# Altium PCB Board.PcbDoc
Units mil, origin at the board's own origin, x right, y up, seen from the top; angles counter-clockwise.
Board outline 3936.5 x 1968.5 mil, 2 copper layers (Top Layer, Bottom Layer); 68 components, 51 nets, 203 pads, 235 vias.
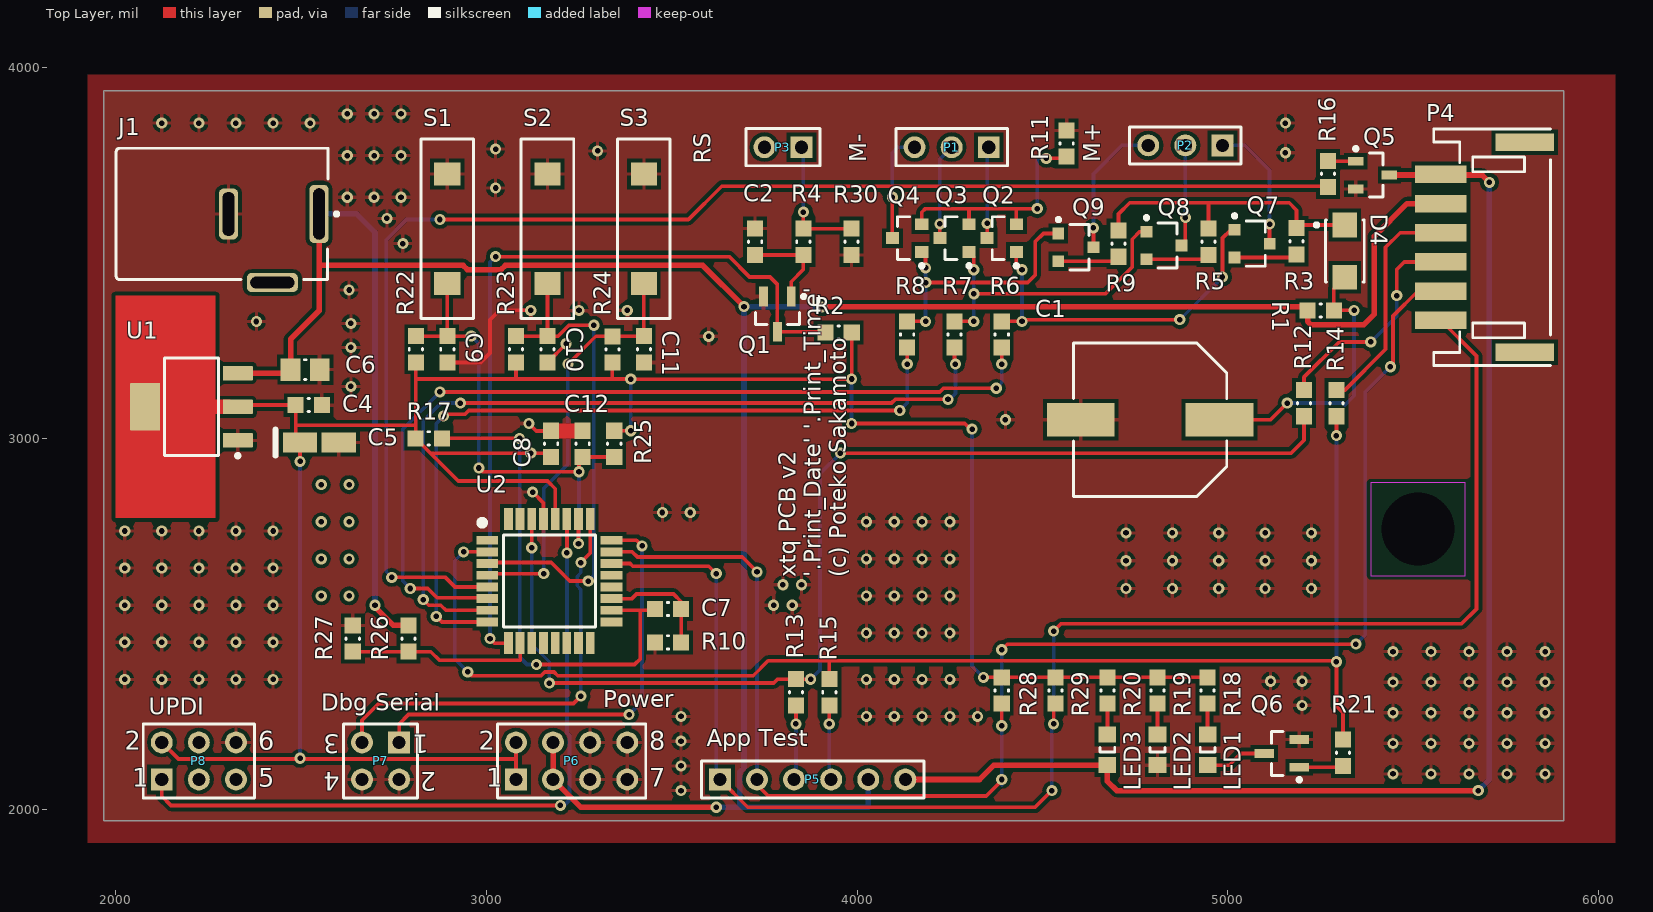
[diagram p0: Top Layer view]
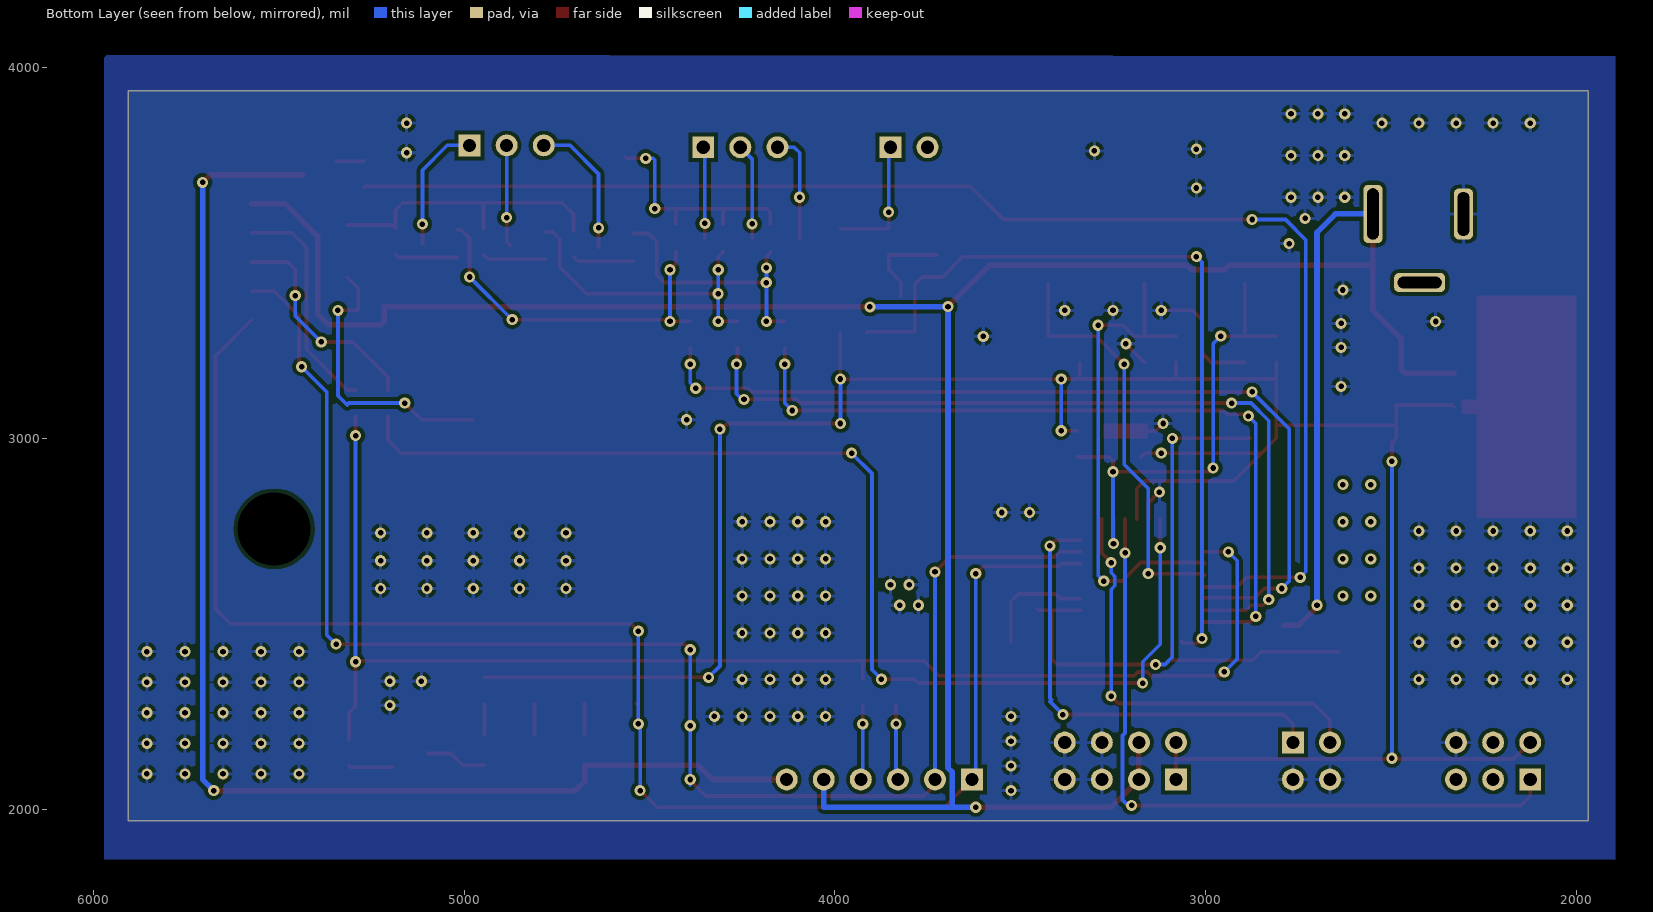
[diagram p1: Bottom Layer view, seen from below]

## Layer stack, top to bottom
Top Solder: solder mask 0.4, Solder Resist, Dk 3.5
Top Layer: signal copper 1.4
Dielectric 1: dielectric 12.6, FR-4, Dk 4.8
Bottom Layer: signal copper 1.4
Bottom Solder: solder mask 0.4, Solder Resist, Dk 3.5

## Board outline
1968.5,1968.5 5905,1968.5 5905,3937.01 1968.5,3937.01

## Design rules (kind name [scope] priority, off if disabled: settings)
Clearance [All] p1: gap=10 ignorepadtopadclearanceinfootprint=TRUE except(0: Arc-Hole Track-Hole SMDPad-Hole THPad-Hole Via-Hole Fill-Hole Poly-Hole Region-Hole Text-Hole)
PolygonConnect [All] p1: connectstyle=Relief reliefconductorwidth=10 reliefentries=4 polygonreliefangle="90 Angle" airgapwidth=10
RoutingVias [All] p1: holewidth=15 width=30 viastyle="Through Hole" minholewidth=12 minwidth=24 maxholewidth=25 maxwidth=100
SolderMaskExpansion [All] p1: expansion=4
Width [All] p1: maxlimit=50 minlimit=8 preferedwidth=10
30 further rules are at their usual default settings.

## Classes and differential pairs
component class Peripherals: C1 C2 C4 C5 C6 D4 J1 LED1 LED2 LED3 P1 P2 P3 P4 P5 P6 P7 P8 Q1 Q2 Q3 Q4 Q5 Q6 Q7 Q8 Q9 R1 R2 R3 R4 R5 R6 R7 R8 R9 R10 R11 R12 R13 R14 R15 R16 R17 R18 R19 R20 R21 R28 R29 R30 U1
component class Controller: C7 C8 C9 C10 C11 C12 R22 R23 R24 R25 R26 R27 S1 S2 S3 U2

## Components (designator, comment, footprint, x,y, rotation, side; value= is the part's Value field where it differs from the comment)
C1 "220uF" PNSC-ZA-G_M 4790,3050 r180 top
C2 "10nF 50V" CAPC0603(1608)100_M 3725,3530 r270 top value=10nF
C4 "100nF" CAPC0603(1608)100_M 2521.46,3090 r180 top
C5 "22uF" KEMT-A-3216-18-2_M 2550,2988.54 r0 top
C6 "22uF" CAPC0805(2012)145_M 2511.61,3185.39 r180 top
C7 "100nF" CAPC0603(1608)100_M 3490,2540 r180 top
C8 "100nF" CAPC0603(1608)100_M 3175,2985 r270 top
C9 "100nF" CAPC0603(1608)100_M 2895,3240 r90 top
C10 "100nF" CAPC0603(1608)100_M 3165,3240 r90 top
C11 "100nF" CAPC0603(1608)100_M 3425,3240 r90 top
C12 "100nF" CAPC0603(1608)100_M 3260,2985 r270 top
D4 "SS14-E3/5AT" VISH-DO-214AC-2_V 5315,3505 r90 top
J1 "PWR" KYCN-KLDX-0202-A_V 2305,3605 r180 top
LED1 "Controller Status" 0805_A 4945,2160 r90 top
LED2 "Power 3V3" 0805_A 4810,2160 r90 top
LED3 "App Status" 0805_A 4675,2160 r90 top
P1 "M-" HDR1X3 4355,3785 r180 top
P2 "M+" HDR1X3 4985,3790 r180 top
P3 "RS" HDR1X2 3850,3785 r180 top
P4 "App" PH2.0-WS-6P 5800,3515 r90 top
P5 "App Test" HDR1X6 3630,2080 r0 top
P6 "Power" HDR2X4 3080,2080 r0 top
P7 "Dbg Serial" HDR2X2 2765,2180 r180 top
P8 "UPDI" HDR2X3 2125,2080 r0 top
Q1 "2N7002" INF-PG-SOT23_M 3785,3335 r270 top
Q2 "NTR4003NT1G" ONSC-SOT-23-3-318-08_V 4390,3540 r180 top
Q3 "NTR4003NT1G" ONSC-SOT-23-3-318-08_V 4262.5,3540 r180 top
Q4 "NTR4003NT1G" ONSC-SOT-23-3-318-08_V 4135,3540 r180 top
Q5 "BSS806NE" INF-PG-SOT23-3_N 5390,3710 r0 top
Q6 "2N7002" INF-PG-SOT23_M 5145,2150.16 r180 top
Q7 "AO3401A" AO-SOT-23-3L_V 5065,3525 r0 top
Q8 "AO3401A" AO-SOT-23-3L_V 4827.5,3520 r0 top
Q9 "AO3401A" AO-SOT-23-3L_V 4590,3515 r0 top
R1 "Jumper 0603(1608)" RESC0603(1608)_M 5250,3345 r0 top value="0.00 Ohm"
R2 "3K3 5% 0603(1608)" RESC0603(1608)_M 3950,3285 r180 top value="3300.00 Ohm"
R3 "27R 5% 0603(1608)" RESC0603(1608)_M 5185,3531.57 r270 top value="27.00 Ohm"
R4 "1M 1%" RESC0603(1608)_M 3855,3530 r90 top value="1000000.00 Ohm"
R5 "27R 5% 0603(1608)" RESC0603(1608)_M 4947.5,3530 r270 top value="27.00 Ohm"
R6 "3K3 5% 0603(1608)" RESC0603(1608)_M 4390,3280 r270 top value="3300.00 Ohm"
R7 "3K3 5% 0603(1608)" RESC0603(1608)_M 4262.5,3280 r270 top value="3300.00 Ohm"
R8 "3K3 5% 0603(1608)" RESC0603(1608)_M 4135,3280 r270 top value="3300.00 Ohm"
R9 "27R 5% 0603(1608)" RESC0603(1608)_M 4705,3525 r270 top value="27.00 Ohm"
R10 "Jumper 0603(1608)" RESC0603(1608)_M 3490,2450 r0 top value="0.00 Ohm"
R11 "Jumper 0603(1608)" RESC0603(1608)_M 4565,3795 r270 top value="0.00 Ohm"
R12 "3K3 5% 0603(1608)" RESC0603(1608)_M 5205,3095 r270 top value="3300.00 Ohm"
R13 "3K3 5% 0603(1608)" RESC0603(1608)_M 3835,2315 r90 top value="3300.00 Ohm"
R14 "3K3 5% 0603(1608)" RESC0603(1608)_M 5292.5,3095 r270 top value="3300.00 Ohm"
R15 "3K3 5% 0603(1608)" RESC0603(1608)_M 3925,2315 r90 top value="3300.00 Ohm"
R16 "3K3 5% 0603(1608)" RESC0603(1608)_M 5270,3712.95 r270 top value="3300.00 Ohm"
R17 "Jumper 0603(1608)" RESC0603(1608)_M 2845,3000 r180 top value="0.00 Ohm"
R18 "160R 5% 0603(1608)" RESC0603(1608)_M 4945,2320 r90 top value="160.00 Ohm"
R19 "160R 5% 0603(1608)" RESC0603(1608)_M 4810,2320 r90 top value="160.00 Ohm"
R20 "160R 5% 0603(1608)" RESC0603(1608)_M 4675,2320 r90 top value="160.00 Ohm"
R21 "5K1 5% 0603(1608)" RESC0603(1608)_M 5310,2152.13 r270 top value="5100.00 Ohm"
R22 "4K7 5% 0603(1608)" RESC0603(1608)_M 2810,3240 r270 top value="4700.00 Ohm"
R23 "4K7 5% 0603(1608)" RESC0603(1608)_M 3080,3240 r270 top value="4700.00 Ohm"
R24 "4K7 5% 0603(1608)" RESC0603(1608)_M 3340,3239.57 r270 top value="4700.00 Ohm"
R25 "4K7 5% 0603(1608)" RESC0603(1608)_M 3345,2985 r90 top value="4700.00 Ohm"
R26 "6K2 1% 0603(1608)" RESC0603(1608)_M 2790,2460 r90 top value="6200.00 Ohm"
R27 "1K 1% 0603(1608)" RESC0603(1608)_M 2640,2460 r270 top value="1000.00 Ohm"
R28 "3K3 5% 0603(1608)" RESC0603(1608)_M 4390,2320 r270 top value="3300.00 Ohm"
R29 "3K3 5% 0603(1608)" RESC0603(1608)_M 4535,2320 r270 top value="3300.00 Ohm"
R30 "1M 1%" RESC0603(1608)_M 3985,3530 r90 top value="1000000.00 Ohm"
S1 "Ctrl reset" "SMD BUTTON" 2895,3565 r270 top
S2 "App power" "SMD BUTTON" 3165,3565 r270 top
S3 "Rotate" "SMD BUTTON" 3425,3565 r270 top
U1 "AMS1117-3.3" DCY0004A_M 2205,3085 r180 top
U2 "ATMEGA3208" QFP80P900X900X120-32N 3170,2615 r0 top

## Footprints (in the part's own frame and the unit in brackets; to place one, negate y for a bottom-side part, rotate by r counter-clockwise, add the part's x,y. Pads: shape width x height; smd on the part's side, far side on the other; paste and mask are expansions set on the pad)
0805_A [mm] "Chip LED, 2-Leads, Body 2.0x1.3mm, IPC Medium Density"
  rect 1.1x1.2 smd: 1(-1.05,0) 2(1.05,0)
  silkscreen extent -0.15,-0.5 0.15,0.5, body extent -1,-0.62 1,0.63, height 0.68
AO-SOT-23-3L_V [mm] "SOT23, 3-Leads, Body 3.1x1.8mm, Pitch 0.95mm"
  rect 0.8x0.8 smd: 1(-1.2,0.95) 2(-1.2,-0.95) 3(1.2,0)
  silkscreen extent -1.32,-1.55 0.9,2.02, body extent -1.5,-1.55 1.5,1.55, height 1.25
CAPC0603(1608)100_M [mm] "Chip Capacitor, Body 1.6x0.8mm, Height 1.0mm, IPC Low Density"
  rect 1.1x1.1 smd: 1(-0.9,0) 2(0.9,0)
  silkscreen extent -0.05,-0.45 0.05,0.45, body extent -0.87,-0.47 0.88,0.48, height 1
CAPC0805(2012)145_M [mm] "Chip Capacitor, Body 2.0x1.2mm, Height 1.45mm, IPC Low Density"
  rect 1.35x1.55 smd: 1(-1,0) 2(1,0)
  silkscreen extent -0.05,-0.67 0.05,0.67, body extent -1.1,-0.72 1.1,0.72, height 1.45
DCY0004A_M [mm] "SOT223, 4-Leads, Body 6.7x3.7mm, Pitch 2.3mm, IPC Low Density"
  rrect10% 2.05x1 smd: 1(-3.175,2.3) 2(-3.175,0) 3(-3.175,-2.3)
  rrect5% 2.05x3.25 smd: 4(3.175,0)
  silkscreen extent -3.3,-3.35 1.85,3.47, body extent -3.5,-3.25 3.5,3.25, height 1.62
HDR1X2 [mm] "Connector; Header; 2 Position"
  rect 1.5x1.5 hole 0.9: 1(0,0)
  round 1.5 hole 0.9: 2(2.54,0)
  silkscreen extent -1.27,-1.27 3.81,1.27
HDR1X3 [mm] "Connector; Header; 3 Position"
  rect 1.5x1.5 hole 0.9: 1(0,0)
  round 1.5 hole 0.9: 2(2.54,0) 3(5.08,0)
  silkscreen extent -1.27,-1.27 6.35,1.27
HDR1X6 [mm] "Connector; Header; 6 Position"
  rect 1.5x1.5 hole 0.9: 1(0,0)
  round 1.5 hole 0.9: 2(2.54,0) 3(5.08,0) 4(7.62,0) 5(10.16,0) 6(12.7,0)
  silkscreen extent -1.27,-1.27 13.97,1.27
HDR2X2 [mm] "Connector; Header; 2x2 Position"
  rect 1.5x1.5 hole 0.9: 1(0,0)
  round 1.5 hole 0.9: 2(0,2.54) 3(2.54,0) 4(2.54,2.54)
  silkscreen extent -1.27,-1.27 3.81,3.81
HDR2X3 [mm] "Connector; Header; 3x2 Position"
  rect 1.5x1.5 hole 0.9: 1(0,0)
  round 1.5 hole 0.9: 2(0,2.54) 3(2.54,0) 4(2.54,2.54) 5(5.08,0) 6(5.08,2.54)
  silkscreen extent -1.27,-1.27 6.35,3.81
HDR2X4 [mm] "Connector; Header; 4x2 Position"
  rect 1.5x1.5 hole 0.9: 1(0,0)
  round 1.5 hole 0.9: 2(0,2.54) 3(2.54,0) 4(2.54,2.54) 5(5.08,0) 6(5.08,2.54) 7(7.62,0) 8(7.62,2.54)
  silkscreen extent -1.27,-1.27 8.89,3.81
INF-PG-SOT23-3_N [mm] "SOT23, 3-Leads, Body 2x1.25 mm, Pitch 0.65 mm, IPC Medium Density"
  rect 1.05x0.6 smd: 1(-1.15,0.95) 2(-1.15,-0.95) 3(1.15,0)
  silkscreen extent -1.27,-1.5 0.7,1.92, body extent -0.7,-1.5 0.7,1.5, height 1
INF-PG-SOT23_M [mm] "SOT23, 3-Leads, Body 2.9x1.3mm, Pitch 0.95mm, IPC Low Density"
  rect 1.35x0.6 smd: 1(-1.2,0.95) 2(-1.2,-0.95) 3(1.2,0)
  silkscreen extent -1.32,-1.5 0.7,1.93, body extent -0.7,-1.5 0.7,1.5, height 1.1
KEMT-A-3216-18-2_M [mm] "Molded TAN Capacitor, 2-Leads, Body 3.4x1.8mm, IPC Low Density"
  rect 2.35x1.35 smd: 1(-1.325,0) 2(1.325,0)
  silkscreen extent -3,-0.9 -3,0.9, body extent -1.7,-0.9 1.7,0.9, height 1.8
KYCN-KLDX-0202-A_V [mm] "Power Jack, 3-Leads, Body 14.5x9mm"
  rrect50% 1.3x4 hole 0.8 slot 3.5 at 90 deg: 1(-6.2,0)
  rrect50% 1.3x3.5 hole 0.8 slot 3 at 90 deg: 2(0,0)
  rrect50% 3.5x1.3 hole 0.8 slot 3 at 0 deg: 3(-3,4.7)
  silkscreen extent -7.53,-4.5 7.7,4.5, body extent -6.8,-4.5 7.7,4.9, height 10.8
ONSC-SOT-23-3-318-08_V [mm] "SOT23, 3-Leads, Body 2.92x1.3mm, Pitch 0.95mm"
  rect 0.9x0.8 smd: 1(-1,0.95) 2(-1,-0.95) 3(1,0)
  silkscreen extent -1.13,-1.46 0.65,2.02, body extent -0.65,-1.46 0.65,1.46, height 1.11
PH2.0-WS-6P [mm] "长：16mm，宽：7.6mm，高：5.5mm"
  rect 1.2x4 smd: 0(-7.2,-0.006) 0(7.2,-0.006)
  rect 1.2x3.5 smd: 1(-5,5.744) 2(-3,5.744) 3(-1,5.744) 4(1,5.744) 5(3,5.744) 6(5,5.744)
  silkscreen extent -8.1,-1.78 8.1,6.22, body extent -8,-1.65 8,6.95, height 5.55
PNSC-ZA-G_M [mm] "Aluminum Electrolytic Capacitor, Body 10.30x10.30x10.50mm, IPC Low Density"
  rect 4.65x2.3 smd: 1(-4.75,0) 2(4.75,0)
  silkscreen extent -5.25,-5.25 5.25,5.25, body extent -6,-5.25 6,5.25, height 10.5
QFP80P900X900X120-32N [mm]
  rect 1.5x0.6 smd: 1(-4.25,2.8) 2(-4.25,2) 3(-4.25,1.2) 4(-4.25,0.4) 5(-4.25,-0.4) 6(-4.25,-1.2) 7(-4.25,-2) 8(-4.25,-2.8) 17(4.25,-2.8) 18(4.25,-2) 19(4.25,-1.2) 20(4.25,-0.4) 21(4.25,0.4) 22(4.25,1.2) 23(4.25,2) 24(4.25,2.8)
  rect 0.6x1.5 smd: 9(-2.8,-4.25) 10(-2,-4.25) 11(-1.2,-4.25) 12(-0.4,-4.25) 13(0.4,-4.25) 14(1.2,-4.25) 15(2,-4.25) 16(2.8,-4.25) 25(2.8,4.25) 26(2,4.25) 27(1.2,4.25) 28(0.4,4.25) 29(-0.4,4.25) 30(-1.2,4.25) 31(-2,4.25) 32(-2.8,4.25)
  silkscreen extent -4.8,-3.15 3.15,4.2, body extent -4.5,-4.5 4.5,4.5, height 1.2
RESC0603(1608)_M [mm] "Chip Resistor, Body 1.6x0.8mm, IPC Low Density"
  rect 1.1x1.1 smd: 1(-0.9,0) 2(0.9,0)
  silkscreen extent -0.05,-0.45 0.05,0.45, body extent -0.85,-0.47 0.85,0.47, height 0.6
"SMD BUTTON" [mm]
  rect 1.6x1.8 smd: 1(-3.75,0) 2(3.75,0)
  silkscreen extent -6.15,-1.8 6.15,1.8
VISH-DO-214AC-2_V [mm] "SMA, 2-Leads, Body 4.245x2.665mm, Height 2.29mm"
  rect 1.7x1.68 smd: 1(-1.79,0) 2(1.79,0)
  silkscreen extent -2.12,-1.33 2.12,2.06, body extent -2.57,-1.33 2.57,1.33, height 2.29

## Part data
C1: library part CMP-2000-06221-1, "Conductive Polymer Hybrid Aluminum Electrolytic Capacitor, 220 uF, +/- 20%, 50 V, -55 to 105 degC, 2-Pin SMD (G), RoHS, Tape and Reel", Capacitance=100uF, Case Diameter=10mm, Case Height=10.5mm, Case Length=10.2mm, Manufacturer=Panasonic, Maximum Operating Temperature=+105C, Minimum Operating Temperature=-55C, Package Description="2-Pin Surface Mount Device, Body 10.3 x 10.3 mm", Package Reference=ZA-G, Ripple Current=2A, Tolerance=20%, Voltage Rating DC=50V, Brand=Panasonic, Datasheet URL=https://industrial.panasonic.com/cdbs/www-data/pdf/RDD0000/DMD0000COL56.pdf, Datasheet Version=06/2016, ESR=28mOhms, Factory Pack Quantity=500, Height=10.5mm, Load Life=10000Hour, Manufacturer URL=http://www.panasonic.com/, Mounting Technology=SurfaceMount, Packaging=Reel, Product=AluminumElectrolyticCapacitors, Product Category=AluminumOrganicPolymerCapacitors, RoHS=Details, Series=ZA, Termination Style=SMD/SMT
C2: library part CMP-1035-02320-1, "CAP 10nF 50V ±5% 0603 (1608 Metric) Thickness 1mm SMD", Case-EIA=0603, Case-Metric=1608, Rated Voltage="50 V", Tolerance=?±5%, Max Thickness="1 mm", Technology=SMT
C4 C7 C8 C9 C10 C11 C12: library part CMP-1035-02592-1, "CAP 100nF 50V ±10% 0603 (1608 Metric) Thickness 1mm SMD", Case-EIA=0603, Case-Metric=1608, Rated Voltage="50 V", Tolerance=?±10%, Max Thickness="1 mm", Technology=SMT
C5: library part CMP-2000-05173-1, "Capacitor, Tantalum, 22 uF, +/- 10%, 16 V, -55 to 125 degC, 2-Pin SMD (1206), RoHS, Tape and Reel", Capacitance=10uF, Case Code=A, Case Style=Molded, Manufacturer=Kemet, Operating Temp Range=-55Cto125C, Package / Case=3216-18, Package Description="2-Pin Surface Mount Device, Body 3.2 x 1.6 mm", Package Reference=1206, Tolerance (+ or -)=10%, Voltage=16VDC, Construction=SMTChip, Datasheet URL=http://www.farnell.com/datasheets/1824869.pdf, Datasheet Version=Apr-14, DCL=1.6uA, DF=8%, ESR=7ohm, Failure Rate=NotRequired, Insulation=NotRequired, Lead Spacing (nom)=NotRequiredmm, Length W/Weld=NotRequiredmm, Manufacturer URL=http://www.kemet.com/, Mounting Style=SurfaceMount, Packaging=TapeandReel, Polarity=Polar, Product Depth (mm)=1.6mm, Product Diameter (mm)=NotRequiredmm, Product Height (mm)=1.6mm, Product Length (mm)=3.2mm, Seal=NotRequired, Seated Plane Height=NotRequiredmm, Wire Form=NotRequired
C6: library part CMP-1036-04942-1, "CAP 22uF 10V ±10% 0805 (2012 Metric) Thickness 1.45mm SMD", Case-EIA=0805, Case-Metric=2012, Rated Voltage="10 V", Tolerance=?±10%, Max Thickness="1.45 mm", Technology=SMT
D4: library part CMP-0549-00004-1, "Schottky Barrier Rectifier, 40 V Maximum DC Blocking Voltage, -65 to 125 degC, 2-Pin SMA Case, RoHS", Manufacturer="Vishay Semiconductor", Operating Temperature="-65 to 125 degC", ComponentLink1Description="Manufacturer URL", ComponentLink1URL=http://www.vishay.com/, ComponentLink2Description=Datasheet, ComponentLink2URL=http://www.vishay.com/docs/88746/ss12.pdf, ComponentLink3Description="Package Specification", ComponentLink3URL=http://www.vishay.com/docs/88746/ss12.pdf, DatasheetVersion=12/17/2012, IF(AV)="1 A Max.", IFSM="40 A", Mounting Technology="Surface Mount", PackageDescription="2-Pin SMD, Body 4.245 x 2.665 mm, Height 2.29 mm", PackageReference=DO-214AC-2, PackageVersion=Dec-12, PartNumber=SS14-E3/5AT, RoHS=TRUE, VDC="40 V Max.", VRMS="28 V Max.", VRRM="40 V Max."
J1: library part CMP-1673-00001-5, "DC Power Jack, 24 V, 3.5 A, -25 to 85 degC, 3-Pin THD, RoHS", Colour=Black, Current Rating="3.5 A", Manufacturer=Kycon, Max Operating Temperature="85 degC", Min Operating Temperature="-25 degC", Package Quantity=500, Voltage Rating="24 V", ComponentLink1Description="Manufacturer URL", ComponentLink1URL=http://www.kycon.com/, ComponentLink2Description=Datasheet, ComponentLink2URL=http://www.kycon.com/Pub_Eng_Draw/KLDX-0202-X.PDF, Connector Type=Power, Contact Gender=Female, Contact Material=Brass, Contact Plating=Tin, DatasheetVersion="Rev. D3, 06/2013", Height="10.8 mm", Housing Material=PBT, Length="9.2 mm", Mount="Through Hole", Mounting Technology="Through Hole", PackageDescription="3-Pin Through Hole Device, Body 14.5 x 9 mm", PackageReference=KLDX-0202-A, Pins=2, RoHSCompliant=true
LED1 LED3: library part CMP-1426-00008-1, "SMD mono-color Chip LED, WL-SMCW, Blue", Color=Blue, Manufacturer="Wuerth Elektronik", PartNumber=150080BS75000, ComponentLink1Description="Manufacturer URL", ComponentLink1URL=http://www.we-online.com, ComponentLink2Description=Datasheet, ComponentLink2URL=http://katalog.we-online.com/led/datasheet/150080BS75000.pdf, PackageReference=0805_A
LED2: library part CMP-1426-00007-1, "SMD mono-color Chip LED, WL-SMCW, Green", Color=Green, Manufacturer="Wuerth Elektronik", PartNumber=150080GS75000, ComponentLink1Description="Manufacturer URL", ComponentLink1URL=http://www.we-online.com, ComponentLink2Description=Datasheet, ComponentLink2URL=http://katalog.we-online.com/led/datasheet/150080GS75000.pdf, PackageReference=0805_A
P1 P2: library part "Header 3", "Header, 3-Pin", LatestRevisionDate=17-Jul-2002, LatestRevisionNote="Re-released for DXP Platform.", Publisher="Altium Limited"
P3: library part "Header 2", "Header, 2-Pin", LatestRevisionDate=17-Jul-2002, LatestRevisionNote="Re-released for DXP Platform.", Publisher="Altium Limited"
P4 P5: library part "Header 6", "Header, 6-Pin", LatestRevisionDate=17-Jul-2002, LatestRevisionNote="Re-released for DXP Platform.", Publisher="Altium Limited"
P6: library part "Header 4X2", "Header, 4-Pin, Dual row", LatestRevisionDate=17-Jul-2002, LatestRevisionNote="Re-released for DXP Platform.", Publisher="Altium Limited"
P7: library part "Header 2X2", "Header, 2-Pin, Dual row", LatestRevisionDate=17-Jul-2002, LatestRevisionNote="Re-released for DXP Platform.", Publisher="Altium Limited"
P8: library part "Header 3X2", "Header, 3-Pin, Dual row", LatestRevisionDate=17-Jul-2002, LatestRevisionNote="Re-released for DXP Platform.", Publisher="Altium Limited"
Q1 Q6: library part CMP-1149-00026-1, "N-Channel OptiMOS Small-Signal-Transistor, 60 V VDS, 0.3?A ID, -55 to 150 degC, PG-SOT23, Reel, Green", Manufacturer=Infineon, ComponentLink1Description="Manufacturer URL", ComponentLink1URL=http://www.infineon.com/, ComponentLink2Description=Datasheet, ComponentLink2URL=http://www.infineon.com/dgdl/2N7002_Rev2.4.pdf?folderId=db3a3043156fd573011622e10b5c1f67&fileId=db3a304319bc939a0119c2a9461e79e6, ComponentLink3Description="Package Specification", ComponentLink3URL=http://www.infineon.com/dgdl/SOT23-Package_Overview.pdf?folderId=db3a30431936bc4b0119532290053c66&fileId=db3a30431936bc4b0119533468123c85, DatasheetVersion="Rev. 2.4", Green=TRUE, Halogen-free=TRUE, ID (max)=0.3??A, IDpuls (max)=1.2??A, Mounting Technology="Surface Mount", PackageDescription="3-Pin Small Outline Transistor Package, 2.9 x 1.3 mm Body, 0.95 mm Pitch", PackageReference=PG-SOT23, PackageVersion=Apr-08, Packing=Reel, PartNumber=2N7002, Ptot (max)=0.5??W, QG=0.4??nC, RDS (on) (max)="3,000 mOhm", RDS (on) (max) (@4.5V)="4,000 mOhm", RthJA (max)="250 K/W", VDS (max)="60 V", VGS(th) (max)=2.5??V, VGS(th) (min)=1.5??V
Q2 Q3 Q4: library part CMP-1058-00759-1, "Small Signal MOSFET, 30 V, 0.56 A, Single N-Channe, 3-Pin SOT-23, Pb-Free, Tape and Reel", Manufacturer="On Semiconductor", Package Type=SOT-23-3, Channel Polarity="N Channel", Ciss Typ (pF)=21, ComponentLink1Description="Manufacturer URL", ComponentLink1URL=http://www.onsemi.com/, ComponentLink2Description=Datasheet, ComponentLink2URL=http://www.onsemi.cn/pub_link/Collateral/NTR4003N-D.PDF, ComponentLink3Description="Package Specification", ComponentLink3URL=http://www.onsemi.cn/pub_link/Collateral/318-08.PDF, Configuration=Single, Coss Typ (pF)=19.7, Crss Typ (pF)=8.1, DatasheetVersion="Rev. 3", ID Max (A)=0.56, Mounting Technology="Surface Mount", PackageDescription="3-Pin Small Outline Transistor, Body 2.92 x 1.3 mm, Pitch 0.95 mm", PackageReference=SOT-23-3-318-08, PackageVersion="Rev. AP, 11/2009", Packing="Tape and Reel", PartNumber=NTR4003NT1G, RoHS=Pb-Free, V(BR)DSS Min (V)=30, VGS(th) Max (V)=1.4, VGS Max (V)=20
Q5: library part CMP-1149-00037-1, "N-Channel OptiMOS(TM)2 Small-Signal-Transistor, 20?V VDS, 2.3?A ID, -55 to 150 degC, PG-SOT23-3, Reel, Green", Manufacturer=Infineon, ComponentLink1Description="Manufacturer URL", ComponentLink1URL=http://www.infineon.com/, ComponentLink2Description=Datasheet, ComponentLink2URL=http://www.infineon.com/dgdl/BSS806NE_Rev2+01.pdf?folderId=db3a3043156fd573011622e10b5c1f67&fileId=db3a304340f610c201410d1548de3366, ComponentLink3Description="Package Specification", ComponentLink3URL=http://www.infineon.com/dgdl/SOT23-Package_Overview.pdf?folderId=db3a30431936bc4b0119532290053c66&fileId=db3a30431936bc4b0119533468123c85, DatasheetVersion="Rev. 2.01", Green=TRUE, Halogen-free=TRUE, ID (max)=2.3??A, IDpuls (max)=9.3??A, Mode=Enhancement, Mounting=SMD, Mounting Technology="Surface Mount", PackageDescription="3-Pin Small Outline Transistor Package, 1.25 x 2 mm Body, 0.65 mm Pitch", PackageReference=PG-SOT23-3, PackageVersion=Apr-08, Packing=Reel, PartNumber=BSS806NE, Polarity=FALSE, Ptot (max)=0.5??W, QG=1.7??nC, RthJA (max)=250??K/W, VDS (max)=20??V, VGS(th) (max)=0.75??V, VGS(th) (min)=0.3??V
Q7 Q8 Q9: library part CMP-2000-05778-1, "P-Channel MOSFET, 30 V, 4 A, -55 to 150 degC, 3-Pin SOT-23-3L, RoHS, Tape and Reel", Continuous Drain Current=4A, Drain-Source On-Volt=30V, Frequency (Max)=NotRequiredMHz, Gate-Source Voltage (Max)=?12V, Manufacturer="Alpha and Omega", Operating Temperature Classification=Military, Operating Temp Range=-55Cto150C, Output Power (Max)=NotRequiredW, Package Description="3-Pin Small Outline Transistor, Body 2.95 x 1.6 mm, Pitch 0.95 mm", Package Reference=SOT-23-3L, Package Type=SOT-23, Power Dissipation=1.4W, Power Gain=NotRequireddB, Channel Mode=Enhancement, Datasheet URL=http://www.aosmd.com/res/data_sheets/AO3401A.pdf, Datasheet Version="Rev. 3, 03/2011", Drain-Source On-Res=0.044ohm, Drain Current (Max)=4A, Drain Efficiency=NotRequired%, Manufacturer URL=http://www.aosmd.com/, Mounting=SurfaceMount, Mounting Technology=SurfaceMount, Noise Figure=NotRequireddB, Number of  Elements=1, Package URL=http://www.aosmd.com/res/packaging_information/SOT-23-3L.pdf, Pin Count=3, Polarity=P, Rad Hardened=No, Type=PowerMOSFET
R1 R10 R11 R17: library part CMP-1012-00001-1, "Jumper 0603 (1608 Metric)", Case-EIA=0603, Case-Metric=1608, Power=None, Technology=SMT, Tolerance=None
R2 R6 R7 R8 R12 R13 R14 R15 R16 R28 R29: library part CMP-1012-00086-1, "3K3 0.1W 5% 0603 (1608 Metric)  SMD", Case-EIA=0603, Case-Metric=1608, Power="0.1 W", Tolerance="5 %", Technology=SMT
R3 R5 R9: library part CMP-1012-00036-1, "27R 0.1W 5% 0603 (1608 Metric)  SMD", Case-EIA=0603, Case-Metric=1608, Power="0.1 W", Tolerance="5 %", Technology=SMT
R4 R30: library part CMP-1012-00849-1, "1M 0.1W 1% 0603 (1608 Metric)  SMD", Case-EIA=0603, Case-Metric=1608, Power="0.1 W", Tolerance="1 %", Technology=SMT
R18 R19 R20: library part CMP-1012-00055-1, "160R 0.1W 5% 0603 (1608 Metric)  SMD", Case-EIA=0603, Case-Metric=1608, Power="0.1 W", Tolerance="5 %", Technology=SMT
R21: library part CMP-1012-00091-1, "5K1 0.1W 5% 0603 (1608 Metric)  SMD", Case-EIA=0603, Case-Metric=1608, Power="0.1 W", Tolerance="5 %", Technology=SMT
R22 R23 R24 R25: library part CMP-1012-00090-1, "4K7 0.1W 5% 0603 (1608 Metric)  SMD", Case-EIA=0603, Case-Metric=1608, Power="0.1 W", Tolerance="5 %", Technology=SMT
R26: library part CMP-1012-00599-1, "6K2 0.1W 1% 0603 (1608 Metric)  SMD", Case-EIA=0603, Case-Metric=1608, Power="0.1 W", Tolerance="1 %", Technology=SMT
R27: library part CMP-1012-00510-1, "1K 0.1W 1% 0603 (1608 Metric)  SMD", Case-EIA=0603, Case-Metric=1608, Power="0.1 W", Tolerance="1 %", Technology=SMT
S1 S2 S3: library part SW-PB, "Switch", LatestRevisionDate=17-Jul-2002, LatestRevisionNote="Re-released for DXP Platform.", PackageDescription="Switch; 2 Leads", PackageReference=SPST-2, Published=24-Mar-1999, Publisher="Altium Limited"
U1: library part CMP-0062-01659-4, "800mA Low-Dropout Linear Regulator, 4-pin SOT-223", Manufacturer="Texas Instruments", PackageTopMarking=XYTT*N05A, PartNumber=LM1117MPX-3.3, PowerWise=N, Code_IPC=SOT223-4, Code_JEDEC=TO-261-AA, ComponentLink1Description="Datasheet URL", ComponentLink1URL=http://www.ti.com/general/docs/lit/getliterature.tsp?genericPartNumber=LM1117-N&fileType=pdf, CompType="LDO IC", High-Reliability=Y, PackageDescription="Molded SOT-223, 6.50 x 3.56 x 1.6mm Body, 4 Lead, 2.3mm Pitch", PackageReference=DCY0004A, PinCount=4, RoHS=N

## Free pads (board coordinates)
  round 60 hole 196.85: 2(5511.81,2755.91)

## Via types
v1: diameter 30, hole 15, Top Layer to Bottom Layer, 235 vias

## Nets (pads, with @x,y where several pads share a name; then routed paths per layer and width w, separated by ;. In a path a pad name is that pad's centre, name@x,y a point inside that pad or via, vN(x,y) a via of type N, cw(c..) or ccw(c..) an arc to the next point about the centre after c; other vN are vias at no path point)
AGND: C7.1 R10.2 U2.19 | length 311.2
  Top Layer w10: U2.19 3392.76,2567.76 3405,2580 3505,2580 3525.43,2559.57 C7.1 R10.2
APP_PWR: R16.2 U2.5 | length 3785.6
  Top Layer w10: v1(2745,2625) 2890,2625 2915.75,2599.25 U2.5 ; v1(2875,3590) 3545,3590 3635,3680 5267.52,3680 R16.2
  Bottom Layer w10: v1(2745,2625) 2730,2640 2730,3535 2785,3590 v1(2875,3590)
APPGND: LED3.1 P4.6 P5.6 Q5.3 | length 3545.5
  Top Layer w15: P5.6 4330,2080 4368.66,2118.66 LED3.1 4675,2075 4700,2050 v1(5675,2050) ; Q5.3 5685,3710 v1(5705,3690)
  Bottom Layer w15: v1(5675,2050) 5705,2080 v1(5705,3690)
AVDD3V3: C7.2 R17.1 U2.18 | length 1389.1
  Top Layer w10: R17.1 v1(3090,3000) ; v1(3135,2390) 3400,2390 3415,2405 3415,2536.26 ; U2.18 3415,2536.26 ; C7.2 3450.83,2536.26 3415,2536.26
  Bottom Layer w10: v1(3090,3000) 3090,2410 3110,2390 v1(3135,2390)
BTN_APP_PWR: C10.2 R23.1 S2.2 U2.3 | length 1354.6
  Top Layer w10: U2.3 3005.43,2665 3175,2665 3225,2615 v1(3275,2615) ; R23.1 C10.2 ; S2.2 C10.2 ; v1(3290,3305) 3223.01,3305 3193.44,3275.43 C10.2
  Bottom Layer w10: v1(3275,2615) 3290,2630 v1(3290,3305)
BTN_ROTATE_M: C11.2 R24.1 S3.2 U2.4 | length 1124.2
  Top Layer w10: U2.4 3006.93,2635 v1(3155,2635) ; v1(3220,3200) 3295,3275 R24.1 3424.57,3275 C11.2 S3.2
  Bottom Layer w10: v1(3155,2635) 3155,2865 3220,2930 v1(3220,3200)
DBG_RXD: P7.3 U2.25 | length 1173
  Top Layer w10: P7.3 2665,2240 2710,2285 3235,2285 v1(3255,2305) ; v1(3255,2665) 3280,2690 3280,2782.09 U2.25
  Bottom Layer w10: v1(3255,2305) 3255,2592.57 3245,2602.57 3245,2627.43 3255,2637.43 v1(3255,2665)
DBG_TXD: P7.1 U2.24 | length 1243
  Top Layer w10: P7.1 2765,2230 2790,2255 v1(3385,2255) ; U2.24 3404.76,2725.24 v1(3420,2710)
  Bottom Layer w10: v1(3385,2255) 3420,2290 3415,2295 3420,2300 v1(3420,2710)
GND: C1.2 C2.1 C4.1 C5.2 C6.1 C8.1 C9.1 C10.1 C11.1 C12.1 J1.2 LED2.1 P6.5 P6.6 P6.7 P6.8 P7.2 P7.4 P8.6 Q1.2 Q5.2 Q6.2 R10.1 R11.1 R27.1 R30.1 S1.1 S2.1 S3.1 U1.1 U2.29 | length 560.5
  Top Layer w10: C9.1 2984.57,3204.57 3010,3230 3010,3320 3035,3345 v1(3120,3345) ; v1(3115,3040) 3135,3020 3174.57,3020 C8.1 ; v1(3125,2855) 3154.25,2825.75 U2.29 ; C10.1 v1(3215.43,3255)
  other v1: 3525,2050 5445,2095 5547.5,2095 5650,2095 5752.5,2095 5855,2095 3525,2116.67 5445,2177.5 5547.5,2177.5 5650,2177.5 5752.5,2177.5 5855,2177.5 3525,2183.33 3525,2250 4025,2250 4100,2250 4175,2250 4250,2250 4325,2250 5445,2260 5547.5,2260 5650,2260 5752.5,2260 5855,2260 5200,2280 5445,2342.5 5547.5,2342.5 5650,2342.5 5752.5,2342.5 5855,2342.5 5115,2345 5200,2345 2025,2350 2125,2350 2225,2350 2325,2350 2425,2350 4025,2350 4100,2350 4175,2350 4250,2350 5445,2425 5547.5,2425 5650,2425 5752.5,2425 5855,2425 2025,2450 2125,2450 2225,2450 2325,2450 2425,2450 4025,2475 4100,2475 4175,2475 4250,2475 2025,2550 2125,2550 2225,2550 2325,2550 2425,2550 3775,2550 3825,2550 4025,2575 4100,2575 4175,2575 4250,2575 4725,2595 4850,2595 4975,2595 5100,2595 5225,2595 3800,2605 3850,2605 2025,2650 2125,2650 2225,2650 2325,2650 2425,2650 4725,2670 4850,2670 4975,2670 5100,2670 5225,2670 4025,2675 4100,2675 4175,2675 4250,2675 4725,2745 4850,2745 4975,2745 5100,2745 5225,2745 2025,2750 2125,2750 2225,2750 2325,2750 2425,2750 4025,2775 4100,2775 4175,2775 4250,2775 3475,2800 3550,2800 4400,3050 2635,3140 2635,3245 3600,3275 2635,3310 2380,3315 3250,3345 3380,3345 2630,3400 2775,3525 2731.98,3593.02 2625,3650 2697.5,3650 2770,3650 3025,3675 2625,3762.5 2697.5,3762.5 2770,3762.5 5155,3770 3300,3775 3025,3780 2125,3850 2225,3850 2325,3850 2425,3850 2525,3850 5155,3850 2625,3875 2697.5,3875 2770,3875
MCTR1: R6.2 U2.6 | length 2418.6
  Top Layer w10: v1(2795,2595) 2842.43,2595 2867.43,2570 3000.43,2570 U2.6 ; v1(2875,3125) 4222.57,3125 4232.57,3135 v1(4375,3135) ; v1(4390,3200) R6.2
  Bottom Layer w10: v1(2795,2595) 2775,2615 2775,3025 v1(2875,3125) ; v1(4375,3135) 4390,3150 v1(4390,3200)
MCTR2: R7.2 U2.7 | length 2257.7
  Top Layer w10: v1(2830,2565) 2845,2550 2877.43,2550 2891.17,2536.26 U2.7 ; v1(2930,3095) 4092.57,3095 4102.57,3105 v1(4245,3105) ; R7.2 4262.5,3202.5 v1(4265,3200)
  Bottom Layer w10: v1(2830,2565) 2830,3047.43 2877.57,3095 v1(2930,3095) ; v1(4245,3105) 4250,3105 4265,3120 v1(4265,3200)
MCTR3: R8.2 U2.8 | length 2106.3
  Top Layer w10: v1(2865,2520) 2880.24,2504.76 U2.8 ; v1(2885,3060) 2890,3065 2942.43,3065 2952.43,3075 v1(4115,3075) ; v1(4135,3200) R8.2
  Bottom Layer w10: v1(2865,2520) 2865,3040 v1(2885,3060) ; v1(4115,3075) 4135,3095 v1(4135,3200)
MFB: Q1.3 R2.2 U2.9 | length 2146.7
  Top Layer w10: v1(3010,2460) 3022.32,2447.68 U2.9 U2.9@3064.45,2452.36 ; v1(3025,3490) 3655,3490 3710,3435 3765,3435 3785,3415 Q1.3 3911.81,3287.76 R2.2
  Bottom Layer w10: v1(3010,2460) 3010,3475 v1(3025,3490)
MGND: Q2.2 Q3.2 Q4.2 R11.2 | length 646.4
  Top Layer w10: Q4.2 4174.37,3609.37 4184.37,3619.37 4300,3619.37 ; Q3.2 4301.87,3617.5 4300,3619.37 ; Q2.2 4429.37,3619.37 ; v1(4485.63,3619.37) 4429.37,3619.37 ; v1(4510,3755) 4560.43,3755 R11.2 ; 4300,3619.37 4429.37,3619.37
  Bottom Layer w10: v1(4485.63,3619.37) 4485.63,3750.63 4490,3755 v1(4510,3755)
MR1: Q2.1 Q7.1 R6.1 | length 985
  Top Layer w10: R6.1 v1(4444.57,3315.43) 4449.13,3320 v1(4870,3320) ; Q2.1 4429.37,3469.76 v1(4444.57,3454.57) ; v1(4985,3435) 4985,3540 5007.4,3562.4 Q7.1
  Bottom Layer w10: v1(4444.57,3315.43) v1(4444.57,3454.57) ; v1(4870,3320) v1(4985,3435)
MR2: Q3.1 Q8.1 R7.1 | length 823
  Top Layer w10: R7.1 v1(4314.57,3315.43) ; Q3.1 4314.57,3489.9 v1(4314.57,3454.57) ; v1(4315,3390) 4669.95,3390 4741.65,3461.7 4741.65,3536.65 4762.4,3557.4 Q8.1
  Bottom Layer w10: v1(4314.57,3315.43) v1(4314.57,3454.57)
MR3: Q4.1 Q9.1 R8.1 | length 707
  Top Layer w10: R8.1 v1(4184.57,3315.43) ; Q4.1@4172.6,3502.6 4184.57,3490.63 v1(4184.57,3459.57) ; v1(4185,3420) 4460,3420 4480,3440 4480,3530 4502.4,3552.4 Q9.1
  Bottom Layer w10: v1(4184.57,3315.43) v1(4184.57,3459.57)
MVDD12V: C1.1 D4.1 R1.2 | length 780.4
  Top Layer w10: C1.1 5115,3050 v1(5160,3095) ; D4.1 5285.43,3404.96 R1.2 v1(5340,3345)
  Bottom Layer w10: v1(5160,3095) 5310,3095 5315,3090 5340,3115 v1(5340,3345)
NetC2_2: C2.2 Q1.1 R4.1 | length 255.8
  Top Layer w10: C2.2 R4.1 3855,3455 3822.4,3422.4 Q1.1
NetD4_2: D4.2 R3.1 R5.1 R9.1 | length 797.4
  Top Layer w10: R9.1 4705,3605 4735,3635 4950,3635 ; R5.1 4947.5,3632.5 4950,3635 ; D4.2 5193.46,3575.47 R3.1 5185,3615 5165,3635 4950,3635
NetLED1_1: LED1.1 Q6.3 | length 165.8
  Top Layer w10: LED1.1 5003.66,2118.66 5035.16,2150.16 Q6.3
NetLED1_2: LED1.2 R18.1 | length 83.2
  Top Layer w10: LED1.2 R18.1
NetLED2_2: LED2.2 R19.1 | length 83.2
  Top Layer w10: LED2.2 R19.1
NetLED3_2: LED3.2 R20.1 | length 83.2
  Top Layer w10: LED3.2 R20.1
NetP1_1: P1.1 Q2.3 | length 253
  Top Layer w10: Q2.3 v1(4350.63,3579.37) ; P1.1@4350.63,3780.63 P1.1
  Bottom Layer w10: v1(4350.63,3579.37) 4350.63,3780.63 P1.1
NetP1_2: P1.2 Q3.3 | length 258.2
  Top Layer w10: Q3.3 v1(4223.13,3578.13)
  Bottom Layer w10: v1(4223.13,3578.13) 4223.13,3753.13 P1.2
NetP1_3: P1.3 Q4.3 | length 296.5
  Top Layer w10: v1(4095,3650) 4095,3540.63 Q4.3
  Bottom Layer w10: v1(4095,3650) 4095,3770 4110,3785 P1.3
NetP2_1: P2.1 Q7.3 | length 352.9
  Top Layer w10: Q7.3 v1(5112.24,3577.76)
  Bottom Layer w10: P2.1 5045,3790 5112.24,3722.76 v1(5112.24,3577.76)
NetP2_2: P2.2 Q8.3 | length 274.2
  Top Layer w10: Q8.3 4885,3530.26 v1(4885,3595)
  Bottom Layer w10: v1(4885,3595) P2.2
NetP2_3: P2.3 Q9.3 | length 377.5
  Top Layer w10: Q9.3 v1(4637.24,3567.24)
  Bottom Layer w10: v1(4637.24,3567.24) 4637.24,3712.76 4714.49,3790 P2.3
NetP3_1: P3.1 R4.2 R30.2 | length 358.7
  Top Layer w10: P3.1 P3.1@3855,3780 ; v1(3855,3610) R4.2 R30.2
  Bottom Layer w10: P3.1 3855,3780 v1(3855,3610)
NetP4_3: P4.3 R12.1 | length 605.3
  Top Layer w10: R12.1 5205,3165 5300,3260 v1(5385,3260) ; v1(5455,3385) 5455,3455 5475.63,3475.63 P4.3
  Bottom Layer w10: v1(5385,3260) 5455,3330 v1(5455,3385)
NetP4_4: P4.4 R14.1 | length 618
  Top Layer w10: R14.1 5315.43,3130.43 5425,3240 5425,3515 5464.37,3554.37 P4.4
NetP5_3: P5.3 R13.1 | length 208.7
  Top Layer w10: P5.3 P5.3@3835,2085 ; v1@3835,2235 R13.1
  Bottom Layer w10: P5.3 3835,2085 v1@3835,2235
  other v1: 3835,2230
NetP5_4: P5.4 R15.1 | length 208.7
  Top Layer w10: P5.4@3925,2085 P5.4 ; v1(3925,2230) R15.1
  Bottom Layer w10: v1(3925,2230) 3925,2085 P5.4
NetQ5_1: Q5.1 R16.1 | length 75.1
  Top Layer w10: R16.1 5270.98,3747.4 Q5.1
NetQ6_1: Q6.1 R21.2 | length 119.4
  Top Layer w10: Q6.1 5306.06,2112.76 R21.2
NetQ7_2: Q7.2 R3.2 | length 170.8
  Top Layer w10: Q7.2 5176.46,3487.6 R3.2
NetQ8_2: Q8.2 R5.2 | length 172.2
  Top Layer w10: Q8.2 4935.53,3482.6 R5.2
NetQ9_2: Q9.2 R9.2 | length 167.2
  Top Layer w10: Q9.2 4693.03,3477.6 R9.2
R\S\T\: C9.2 C12.2 R22.1 R25.1 S1.2 U2.26 | length 1321.7
  Top Layer w10: R22.1 C9.2 ; S1.2 C9.2 ; v1(2959.57,3275.43) C9.2 ; v1(2980,2920) 2990,2910 v1(3250,2910) 3250,2934.57 3247.5,2937.07 C12.2 R25.1 ; v1(3248.74,2716.26) U2.26
  Bottom Layer w10: v1(2959.57,3275.43) 2980,3255 v1(2980,2920) ; v1(3248.74,2716.26) 3247.5,2717.5 3250,2720 v1(3250,2910)
RDY: R12.2 R13.2 U2.30 | length 3142.7
  Top Layer w10: v1(3122.76,2705) U2.30 ; v1(3170,2340) 3775,2340 3785.43,2350.43 R13.2 v1(3874.57,2350.43) ; v1(3955,2960) 5170,2960 5205,2995 R12.2
  Bottom Layer w10: v1(3122.76,2705) 3122.76,2444.67 3170,2397.43 v1(3170,2340) ; v1(3874.57,2350.43) 3900,2375.87 3900,2905 v1(3955,2960)
SCL: P4.2 P5.2 R28.2 U2.23 | length 4150.6
  Top Layer w10: U2.23 3393.83,2693.74 3407.57,2680 3690,2680 v1(3730,2640) ; P5.2 3730,2065.94 3760.47,2035.47 4348.44,2035.47 4390,2077.03 v1(4390,2080) ; v1(4390,2225) R28.2 ; v1(4390,2430) 4405,2445 v1(5345,2445) ; v1(5438.15,3193.15) 5445,3200 5445,3330 5511.89,3396.89 P4.2
  Bottom Layer w10: P5.2 v1(3730,2640) ; v1@4390,2065 v1(4390,2225) v1(4390,2430) ; v1(5345,2445) 5370,2470 5370,3125 v1(5438.15,3193.15)
SDA: P4.1 P5.1 R29.2 U2.22 | length 4269.4
  Top Layer w10: U2.22 3387.76,2662.24 3395,2655 3600,2655 v1(3620,2635) ; P5.1 3705,2005 4480,2005 v1(4525,2050) ; v1(4530,2230) 4530,2279.57 R29.2 ; v1(4530,2480) 4550,2500 5630,2500 5670,2540 5670,3221.99 P4.1
  Bottom Layer w10: v1(3620,2635) 3620,2090 P5.1 ; v1(4525,2050) 4525,2225 v1(4530,2230) v1(4530,2480)
STATUS: R14.2 R15.2 R21.1 U2.2 | length 3712.3
  Top Layer w10: v1(2938.74,2693.74) U2.2 ; v1(2950,2370) 2960,2360 3147.43,2360 3157.43,2370 3182.43,2370 3192.43,2360 3720,2360 3760,2400 3925,2400 ; R15.2 3925,2400 ; v1(5292.5,2397.5) 5292.5,2277.5 5310,2260 R21.1 ; v1@5292.5,2400 3925,2400 ; v1(5292.5,3007.5) R14.2
  Bottom Layer w10: v1(2938.74,2693.74) 2915,2670 2915,2405 v1(2950,2370) ; v1(5292.5,2397.5) v1(5292.5,3007.5)
TWI_MSCL: U2.32
TWI_MSDA: U2.1
UPDI: P8.1 U2.27 | length 1923
  Top Layer w10: P8.1 2125,2035 2150,2010 v1(3200,2010) ; v1@3216.57,2690 v1(3217.5,2690.93) 3217.5,2782.07 U2.27
  Bottom Layer w10: v1(3200,2010) 3210,2010 3224.53,2024.53 3224.53,2198.44 3217.5,2205.47 v1(3217.5,2690.93)
VBAT_MONITOR: R26.1 R27.2 U2.10 | length 507.3
  Top Layer w10: R27.2 R26.1 2850.43,2424.57 2873.74,2401.26 3091.26,2401.26 U2.10
VDD3V3: C4.2 C5.1 C8.2 P6.1 P6.2 P8.2 R2.1 R17.2 R18.2 R19.2 R20.2 R22.2 R23.2 R24.2 R25.2 R28.1 R29.1 U1.2 U1.4 U2.28 | length 6901.5
  Top Layer w10: U1.4 U1.4@2100,3065 ; P8.2 2170,2135 3080,2135 ; U1.2 2335,3090 C4.2 2486.02,3035 ; v1(2497.83,2937.83) C5.1 2486.02,3000.35 2486.02,3035 ; R22.2 2810,3160 ; P6.1 3080,2135 ; P6.2 3080,2135 ; R23.2 3080,3160 ; C8.2 3164.57,2960 v1(3120,2960) 2849.57,2960 ; U2.28 3185.75,2864.25 3165,2885 2924.57,2885 2849.57,2960 ; R24.2 3340,3160 ; R25.2 v1(3389.57,3020.43) ; v1(3985,3040) 4290,3040 4305,3025 v1(4310,3025) ; R2.1 3985.43,3160.43 v1(3985,3160) 3984.57,3159.57 v1(3389.57,3159.57) 3389.13,3160 3340,3160 ; v1(4340.43,2355.43) R28.1 R29.1 R20.2 R19.2 R18.2 ; 2486.02,3035 2810,3035 ; 2810,3035 2810,3160 ; 2810,3035 2810,3000.43 R17.2 2849.57,2960 ; 2810,3160 3080,3160 ; 3080,3160 3340,3160
  Bottom Layer w10: v1(2497.83,2137.17) v1(2497.83,2937.83) ; v1(3389.57,3020.43) v1(3389.57,3159.57) ; v1(3985,3040) v1(3985,3160) ; v1(4310,3025) 4310,2385.87 v1(4340.43,2355.43)
VDD12V: C6.2 J1.1 P4.5 P5.5 P6.3 P6.4 R1.1 R26.2 U1.3 | length 7680.7
  Top Layer w15: U1.3 2462.4,3175.55 C6.2 2472.24,3267.24 2549.09,3344.09 2549.09,3465 ; J1.1 2549.09,3465 ; v1(2700,2550) 2700,2545 2749.57,2495.43 R26.2 ; P6.4 P6.3 3255,2005 v1(3620,2005) ; v1(3695,3355) 3583.64,3466.36 3051.36,3466.36 3040,3455 2949.04,3455 2937.68,3466.36 2550.45,3466.36 2549.09,3465 ; v1(3905.41,3354.59) 5214.57,3354.59 R1.1 5214.57,3315.43 5224.15,3305.85 5365.85,3305.85 5395,3335 5395,3545 5483.11,3633.11 P4.5
  Bottom Layer w15: J1.1 2650,3605 2700,3555 v1(2700,2550) ; v1(3620,2005) 4030,2005 P5.5 ; 3682.97,2007.97 3682.97,2099.48 3695,2111.51 v1(3695,3355) 3695.41,3354.59 v1(3905.41,3354.59)
pads on no net: J1.3 P3.2 P4.0 P8.3 P8.4 P8.5 U2.11 U2.12 U2.13 U2.14 U2.15 U2.16 U2.17 U2.20 U2.21 U2.31
copper on no net:
  other v1: 2555,2575 2630,2575 2555,2675 2630,2675 2555,2775 2630,2775 2555,2875 2630,2875

## Polygon pours and split planes (outlines as drawn)
GND on Bottom Layer "Bottom Layer-GND" (solid, remove dead copper, pour order 6): 5970,4035 5970,1865 1895,1865 1895,4030
GND on Top Layer "Top Layer-GND" (solid, remove dead copper, pour order 5): 1925,3980 1925,1910 6045,1910 6045,3980

## Keep-outs
Top Layer:
  rectangle: 5385,2630 5640,2880

## Other copper
Top Layer:
  rectangle net GND: 3155,3000 3275,3040
  rectangle net VDD3V3: 2195,3065 2310,3105
  rectangle net VDD3V3: 2000,2785 2270,3385

## Silkscreen, mask and mechanical layers (free items; w line width, h text height)
Top Overlay:
  text "xtq PCB v2 / '.Print_Date' '.Print_Time' / (c) Poteko Sakamoto" at 3970,2625 h45 r90
Mechanical 1:
  lines w10: 1968.5,1968.5 5905.51,1968.5 5905.51,3937.01 1968.5,3937.01 1968.5,1968.5

## Text inside footprints (layer, text, board x,y; h text height)
P6: Top Overlay "2" at 2980,2160 h50; Top Overlay "1" at 3000,2060 h50; Top Overlay "7" at 3440,2060 h50; Top Overlay "8" at 3440,2160 h50
P7: Top Overlay "1" at 2845,2200 h50 r180; Top Overlay "2" at 2865,2100 h50 r180; Top Overlay "4" at 2605,2100 h50 r180; Top Overlay "3" at 2605,2200 h50 r180
P8: Top Overlay "6" at 2385,2160 h50; Top Overlay "5" at 2385,2060 h50; Top Overlay "2" at 2025,2160 h50; Top Overlay "1" at 2045,2060 h50